# EAGLE board ASD2511 (EAGLE 6.3)
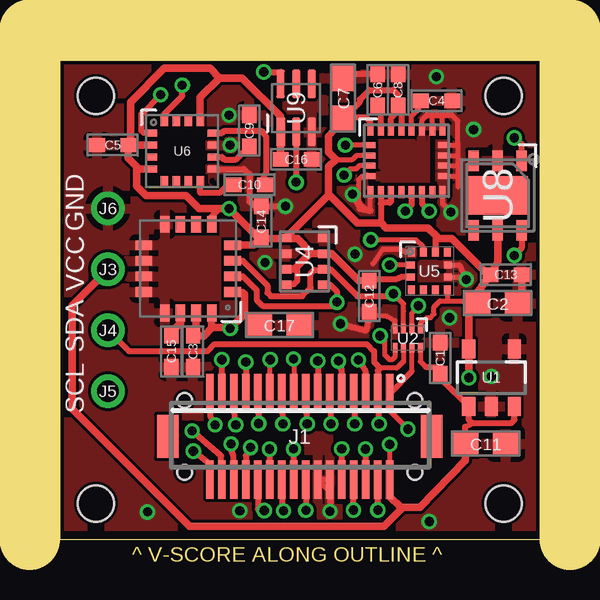
[diagram p0: board, top side]
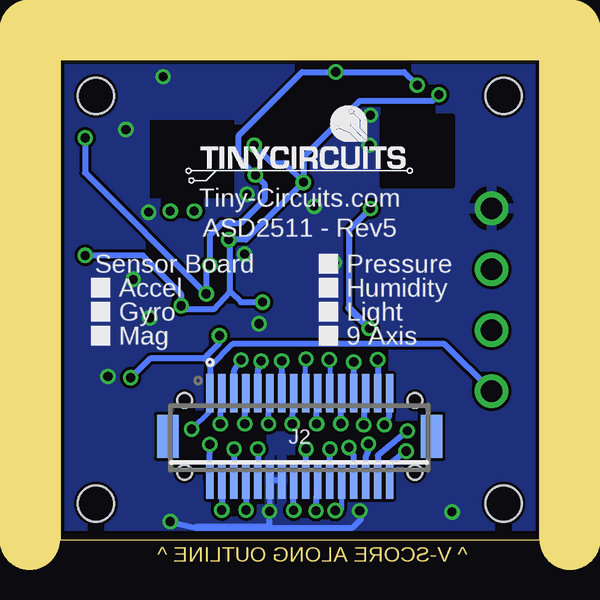
[diagram p1: board, bottom side, seen from below]

Size 20 x 20 mm. Coordinates in mm from the lower left corner, seen from the top.
Outline: 0,20 20,20 20,0 0,0 0,20
Copper layers (1*16): Top 0.035mm / dielectric 1.5mm / Bottom 0.035mm
Design rules "default *": minimum track width 5mil, minimum drill 12mil, track to track 5mil, track to pad 5mil, pad to pad 5mil, via to via 6mil, smd to smd 5mil, copper to edge 6mil, drill to drill 8mil, minimum pad ring 10mil, minimum via ring 5mil, stop-mask expansion 4mil, vias tented up to drill 25mil, thermal gap 10mil
Holes 1.5 mm at 1.5,18.5 18.5,18.5 18.5,1.5 1.5,1.5
tRestrict: 19 lines
bRestrict: area 12.8,14.2 to 16.2,17.5; 5 lines
Milling: 3 lines

## Footprints (pad centres in the part's own frame; a part is rotated, then mirrored left to right if it is on the bottom)
C0402 = smd 0.65 x 0.6: 1 -0.65,0; 2 0.65,0
C0603 = smd 1.1 x 1: 1 -0.85,0; 2 0.85,0
DF12-32-DP = smd 0.3 x 1.6: 1 -3.75,-1.8; 2 -3.75,1.8; 3 -3.25,-1.8; 4 -3.25,1.8; 5 -2.75,-1.8; 6 -2.75,1.8; 7 -2.25,-1.8; 8 -2.25,1.8; 9 -1.75,-1.8; 10 -1.75,1.8; 11 -1.25,-1.8; 12 -1.25,1.8; 13 -0.75,-1.8; 14 -0.75,1.8; 15 -0.25,-1.8; 16 -0.25,1.8; 17 0.25,-1.8; 18 0.25,1.8; 19 0.75,-1.8; 20 0.75,1.8; 21 1.25,-1.8; 22 1.25,1.8; 23 1.75,-1.8; 24 1.75,1.8; 25 2.25,-1.8; 26 2.25,1.8; 27 2.75,-1.8; 28 2.75,1.8; 29 3.25,-1.8; 30 3.25,1.8; 31 3.75,-1.8; 32 3.75,1.8 | smd 0.9 x 1.8: F1 -5.5,0; F2 5.5,0 | hole 0.6: -4.8,1.5; 4.8,1.5
DF12-32-DS = smd 0.3 x 1.6: 1 -3.75,1.8; 2 -3.75,-1.8; 3 -3.25,1.8; 4 -3.25,-1.8; 5 -2.75,1.8; 6 -2.75,-1.8; 7 -2.25,1.8; 8 -2.25,-1.8; 9 -1.75,1.8; 10 -1.75,-1.8; 11 -1.25,1.8; 12 -1.25,-1.8; 13 -0.75,1.8; 14 -0.75,-1.8; 15 -0.25,1.8; 16 -0.25,-1.8; 17 0.25,1.8; 18 0.25,-1.8; 19 0.75,1.8; 20 0.75,-1.8; 21 1.25,1.8; 22 1.25,-1.8; 23 1.75,1.8; 24 1.75,-1.8; 25 2.25,1.8; 26 2.25,-1.8; 27 2.75,1.8; 28 2.75,-1.8; 29 3.25,1.8; 30 3.25,-1.8; 31 3.75,1.8; 32 3.75,-1.8 | smd 0.9 x 1.8: F1 -5.5,0; F2 5.5,0 | hole 0.6: -4.8,1.5; 4.8,1.5
1X.1"_2 = drill 0.889 pad 1.397: 1 0,0
SOT-25 = smd 0.55 x 0.8: 1 -0.95,-1.2; 2 0,-1.2; 3 0.95,-1.2; 4 0.95,1.2; 5 -0.95,1.2
DQE(R-PX2SON-N8) = smd 0.2 x 0.4: 1 -0.525,-0.4; 2 -0.175,-0.4; 3 0.175,-0.4; 4 0.525,-0.4; 5 0.525,0.4; 6 0.175,0.4; 7 -0.175,0.4; 8 -0.525,0.4
LGA-24 = smd 0.25 x 0.5: 1 -1.505,1.3; 6 -1.505,-1.3; 7 -1.075,-1.3; 8 -0.645,-1.3; 9 -0.215,-1.3; 10 0.215,-1.3; 11 0.645,-1.3; 12 1.075,-1.3; 13 1.505,-1.3; 18 1.505,1.3; 19 1.075,1.3; 20 0.645,1.3; 21 0.215,1.3; 22 -0.215,1.3; 23 -0.645,1.3; 24 -1.075,1.3 | smd 0.5 x 0.25: 2 -1.55,0.645; 3 -1.55,0.215; 4 -1.55,-0.215; 5 -1.55,-0.645; 14 1.55,-0.645; 15 1.55,-0.215; 16 1.55,0.215; 17 1.55,0.645
BMP280 = smd 0.5 x 0.35: 1 0.8,0.975; 2 0.8,0.325; 3 0.8,-0.325; 4 0.8,-0.975; 5 -0.8,-0.975; 6 -0.8,-0.325; 7 -0.8,0.325; 8 -0.8,0.975
3-AXIS_ACCELEROMETER = smd 0.3 x 0.35: 1 -0.75,0.775; 4 -0.75,-0.775; 5 -0.25,-0.775; 6 0.25,-0.775; 7 0.75,-0.775; 10 0.75,0.775; 11 0.25,0.775; 12 -0.25,0.775 | smd 0.35 x 0.3: 2 -0.775,0.25; 3 -0.775,-0.25; 8 0.775,-0.25; 9 0.775,0.25
HMC5883L = smd 0.45 x 0.3: 1 -1.275,0.75; 2 -1.275,0.25; 3 -1.275,-0.25; 4 -1.275,-0.75; 9 1.275,-0.75; 10 1.275,-0.25; 11 1.275,0.25; 12 1.275,0.75 | smd 0.3 x 0.45: 5 -0.75,-1.275; 6 -0.25,-1.275; 7 0.25,-1.275; 8 0.75,-1.275; 13 0.75,1.275; 14 0.25,1.275; 15 -0.25,1.275; 16 -0.75,1.275
L3G4200D = smd 0.7 x 0.4: 1 -1.85,0.975; 2 -1.85,0.325; 3 -1.85,-0.325; 4 -1.85,-0.975; 9 1.85,-0.975; 10 1.85,-0.325; 11 1.85,0.325; 12 1.85,0.975 | smd 0.4 x 0.7: 5 -0.975,-1.85; 6 -0.325,-1.85; 7 0.325,-1.85; 8 0.975,-1.85; 13 0.975,1.85; 14 0.325,1.85; 15 -0.325,1.85; 16 -0.975,1.85
DFN6 = smd 0.85 x 0.45: 1 -1.45,1; 2 -1.45,0; 3 -1.45,-1; 4 1.45,-1; 5 1.45,0; 6 1.45,1 | smd 1.6 x 2.5: PAD 0,0
TSL2572 = smd 1.2 x 0.35: 1 -1,0.65; 2 -1,0; 3 -1,-0.65; 4 1,-0.65; 5 1,0; 6 1,0.65

## Placement (x,y rotation side)
C1  0.1uF  [C0402]  15.86,7.57 90 top
C2  10uF  [C0603]  18.25,9.85 0 top
C3  0.1uF  [C0402]  5.55,7.85 270 top
C4  10nF  [C0402]  15.7,18.3 0 top
C5  0.1uF  [C0402]  2.2,16.45 180 top
C6  0.1uF  [C0402]  13.25,18.75 90 top
C7  10uF  [C0603]  11.8,18.4 90 top
C8  0.1uF  [C0402]  14.1,18.75 90 top
C9  4.7uF  [C0402]  7.9,17.05 90 top
C10  .22uF  [C0402]  7.9,14.8 0 top
C11  10uF  [C0603]  17.75,4 0 top
C12  0.1uF  [C0402]  12.9,10.15 270 top
C13  0.1uF  [C0402]  18.6,11.05 0 top
C14  0.1uF  [C0402]  8.4,13.25 90 top
C15  0.1uF  [C0402]  4.65,7.85 270 top
C16  0.1uF  [C0402]  9.85,15.85 0 top
C17  10uF  [C0603]  9.15,8.95 0 top
J1  DF12-32-DP  [DF12-32-DP]  10,4.3 180 top
J2  DF12-32-DS  [DF12-32-DS]  10,4.3 0 bottom
J3  PIN_1X.1"1  [1X.1"_2]  2,11.27 0 top
J4  PIN_1X.1"1  [1X.1"_2]  2,8.73 0 top
J5  PIN_1X.1"1  [1X.1"_2]  2,6.19 0 top
J6  PIN_1X.1"1  [1X.1"_2]  2,13.81 0 top
U1  XC6217A33  [SOT-25]  17.99,6.75 0 top
U2  TX0102  [DQE(R-PX2SON-N8)]  14.5,8.4 180 top
U3  LSM9DS1  [LGA-24]  14.45,15.8 0 top
U4  BMP280  [BMP280]  10.2,11.6 0 top
U5  BMA250  [3-AXIS_ACCELEROMETER]  15.4,11.2 0 top
U6  HMC5883L  [HMC5883L]  5.1,16.2 0 top
U7  L3G4200D  [L3G4200D]  5.35,11.3 180 top
U8  SI7020-A10-GM1  [DFN6]  18.25,14.35 270 top
U9  TSL2572  [TSL2572]  9.85,18 90 top
U$1  [DOCFIELD-TINYCIRCUITS-PCB]  33.91,-10 0 top  (outside the outline)

## Library data of the parts
C1 C8 C15 C16 = tinycircuits; DATABASE: ./../../../../../Components/TinyCircuits_Part_Database.txt; PARTNO: AS-ITM-00008
C2 C7 = tinycircuits; DATABASE: ./../../../../../Components/TinyCircuits_Part_Database.txt; PARTNO: AS-ITM-00002
C3 C5 C6 C12-C14 = tinycircuits; PARTNO: AS-ITM-00008
C4 = tinycircuits; PARTNO: AS-ITM-00084
C9 = tinycircuits; PARTNO: AS-ITM-00242
C10 = tinycircuits; PARTNO: AS-ITM-00087
C11 C17 = tinycircuits; PARTNO: AS-ITM-00002
J1 = tinycircuits; PARTNO: AS-ITM-00015
J2 = tinycircuits; PARTNO: AS-ITM-00012
J3 = tinycircuits
J4-J6 = tinycircuits; DATABASE: ./../../../../../Components/TinyCircuits_Part_Database.txt
U1 = tinycircuits; PARTNO: AS-ITM-00249
U2 = tinycircuits; PARTNO: AS-ITM-00073; VALUE: TXS0102
U3 = tinycircuits; PARTNO: AS-ITM-00265
U4 = tinycircuits; PARTNO: AS-ITM-00264
U5 = tinycircuits; PARTNO: AS-ITM-00070
U6 = tinycircuits; PARTNO: AS-ITM-00086
U7 = tinycircuits; PARTNO: AS-ITM-00089
U8 = tinycircuits; PARTNO: AS-ITM-00218
U9 = tinycircuits; PARTNO: AS-ITM-00116
U$1 = tinycircuits; NO_BOM: TRUE

## Nets
+3V3: J1.6 J2.6
+5V: J1.8 J2.8
AD0: J1.11 J2.11
AD1: J1.9 J2.9
AD2: J1.7 J2.7
AD3: J1.5 J2.5
AD4/SDA: J1.3 J2.3 J4.1 U2.6
AD5/SCL: J1.1 J2.1 J5.1 U2.7
AREF: J1.13 J2.13
GND: C1.2 C2.2 C3.2 C4.2 C5.2 C6.2 C7.2 C8.2 C9.2 C11.2 C12.2 C13.2 C14.2 C15.2 C16.2 C17.2 J1.12 J1.14 J2.12 J2.14 J6.1 U1.2 U1.4 U2.4 U3.5 U3.6 U3.13 U3.14 U3.15 U3.16 U3.17 U3.18 U3.19 U3.20 U4.1 U4.7 U5.1 U5.8 U5.9 U6.9 U6.11 U7.8 U7.9 U7.10 U7.11 U7.12 U7.13 U8.2 U9.3
IO0: J1.24 J2.24
IO1: J1.26 J2.26
IO2: J1.28 J2.28
IO3: J1.30 J2.30
IO4: J1.32 J2.32
IO5: J1.31 J2.31
IO6: J1.29 J2.29
IO7: J1.27 J2.27
IO8: J1.25 J2.25
IO9: J1.23 J2.23
MISO: J1.17 J2.17
MOSI: J1.19 J2.19
N$2: C4.1 U3.21
N$3: C15.1 U7.14
N$4: C9.1 U6.10
N$6: C6.1 U3.24
N$7: C10.2 U6.12
N$9: C10.1 U6.8
N$10: U9.5
N$11: U3.9
N$12: U7.6
N$14: U5.5
N$15: U5.6
N$16: U7.7
N$17: U3.10
N$18: U3.11
N$19: U3.12
RESET: J1.22 J2.22
RSV0: J1.20 J2.20
RSV1: J1.18 J2.18
RSV2: J1.16 J2.16
SCK: J1.15 J2.15
SCL_3V3: U2.2 U3.2 U4.4 U5.12 U6.1 U7.2 U8.6 U9.2
SDA_3V3: U2.3 U3.4 U4.3 U5.2 U6.16 U7.3 U8.1 U9.6
SS: J1.21 J2.21
VBATT: J1.4 J2.4
VCC: C1.1 C11.1 J1.2 J2.2 J3.1 U1.1 U1.3 U2.8
VCC_3V3: C2.1 C3.1 C5.1 C7.1 C8.1 C12.1 C13.1 C14.1 C16.1 C17.1 U1.5 U2.1 U2.5 U3.1 U3.3 U3.7 U3.8 U3.22 U3.23 U4.2 U4.5 U4.6 U4.8 U5.3 U5.7 U5.11 U6.2 U6.4 U6.13 U7.1 U7.4 U7.5 U7.15 U7.16 U8.5 U9.1
VIN: J1.10 J2.10

## Tracks (layer width: path | path; a pad name or v marks a point on that pad's centre or on a via)
+3V3  (via drill 0.38)
  Top 0.254: J2.6 v12.75,3.77 v12.74,3.77
  Bottom 0.254: v12.74,3.77 12.74,2.51 J2.6
+5V  (via drill 0.38)
  Top 0.254: v12.24,1.23 J2.8
  Bottom 0.254: J2.8 12.25,1.21 v12.24,1.23
AD0  (via drill 0.38)
  Top 0.254: v11.3,4.83 11.31,5.05 J2.11
  Bottom 0.254: J2.11 11.28,5.79 v11.3,4.83
AD1  (via drill 0.38)
  Top 0.254: J2.9 11.74,7.07 v11.61,7.44
  Bottom 0.254: v11.61,7.44 11.73,7.07 J2.9
AD2  (via drill 0.38)
  Top 0.254: v12.29,4.83 12.31,5.05 J2.7
  Bottom 0.254: J2.7 12.27,5.86 v12.29,4.83
AD3  (via drill 0.38)
  Top 0.254: J2.5 12.73,7.04 v12.45,7.49
  Bottom 0.254: v12.45,7.49 12.73,7.05 J2.5
AD4/SDA  (via drill 0.38)
  Top 0.2: U2.6 14.32,7.43 14.05,7.15
  Top 0.203: 14.05,7.15 13.35,7.15
  Top 0.254: v13.31,4.83 13.31,5 J2.3 13.25,7.05 13.35,7.15 13.1,7.4 13.1,7.85 12.8,8.15 6.45,8.15 6.15,7.85 2.88,7.85 J4.1
  Bottom 0.254: J2.3 13.28,5.86 v13.31,4.83
AD5/SCL  (via drill 0.38)
  Top 0.2: 14.68,7.02 U2.7
  Top 0.203: J2.1 13.75,5.37 v14.51,4.61
  Top 0.254: J2.1 14.68,7.02
  Bottom 0.203: v14.51,4.61 13.75,5.37 J2.1
  Bottom 0.254: J2.1 13.75,7.2 12.8,8.15 3.96,8.15 J5.1
AREF  (via drill 0.38)
  Top 0.254: v10.75,7.45 J2.13
  Bottom 0.254: J2.13 v10.75,7.45
GND  (via drill 0.38)
  Top 0.2: U2.4 13.98,9.12 13.65,9.3 12.9,9.35
  Top 0.203: J2.12 v11.26,1.17 | 11.3,1.95 11.3,1.14 | 11.3,1.14 11.29,1.13 11.29,1.09 | J2.14 11.27,1.97 11.27,1.93 11.22,1.87 11.27,1.16 11.28,1.07 11.28,1.03 11.3,1.01 11.37,1.01 | 11.3,1.14 11.3,1.01 | U5.8 16.6,10.95 v16.95,10.85 16.65,11.45 U5.9 | U5.1 14.43,11.98 14.15,12.1 13.45,12.1 13.05,11.5 | 12.15,19.4 C7.2 | U3.5 12.61,15.16 12.45,15 12.45,14.15 12.55,13.95 12.95,13.7 12.95,14.14 U3.6 | U3.20 15.1,17.5 15.3,17.7 15.55,17.7 | 15.55,17.7 16,17.7 | 16,17.7 16.35,17.7 16.6,17.45 16.6,16.5 16.55,16.45 U3.17 16.59,16.45 16.6,16.45 16.6,16 | U3.19 15.52,17.68 15.55,17.7 | U3.18 15.95,17.66 16,17.7 | 16.6,16 16.6,15.55 | 16.6,15.55 16.6,15.1 | 16.6,15.1 16.6,14.7 | U3.16 16.59,16.02 16.6,16 | U3.15 16.57,15.59 16.6,15.55 | U3.14 16.55,15.16 16.6,15.1 | U3.13 15.95,14 v16.3,13.65
  Top 0.254: J2.12 J2.14 | C12.2 12.9,9.35 12.75,8.7 v11.7,9 12.2,8.85 | U6.9 7.65,15.45 7.9,15.25 7.9,14.1 8.15,13.9 v9.4,13.9 | v12.2,14.4 12.5,13.8 12.95,13.7 | C6.2 12.23,19.4 arc45 12.01,19.31 C7.2
  Top 0.305: C2.2 19.25,10.2 C13.2
  Bottom 0.203: v11.26,1.17 11.25,1.21 J2.12
  Bottom 0.254: J2.12 J2.14 | v15.4,0.75 14.35,0.5 | 14.35,0.5 7.8,0.5 7.45,0.85 v7.5,1.2 | 14.35,0.5 14.3,0.55 11.25,0.55 11.26,0.56 v11.26,1.17
  other vias: 15.7,19.3 7.05,17.7 17.25,17.1 3.65,1.15 7.1,16.45 8.55,11.55 12.3,11.9 18,6.8 16.25,9.25
  pour Top: 0,0 20,0 20,20 0,20
  pour Bottom: 0,20 20,20 20,0 0,0
IO0  (via drill 0.38)
  Top 0.254: J2.24 8.25,1.26 v8.52,1.21
  Bottom 0.203: v8.52,1.21 8.48,1.27 8.25,1.27 J2.24
  Bottom 0.254: J2.24
IO1  (via drill 0.38)
  Top 0.254: v7.95,3.84 7.95,3.7 7.75,3.5 J2.26
  Bottom 0.254: J2.26 7.75,3.5 7.95,3.7 v7.95,3.84
IO2  (via drill 0.38)
  Top 0.254: v7.13,3.99 7.07,3.89 7.22,3.49 7.29,2.61 7.26,2.51 J2.28
  Bottom 0.254: J2.28 7.24,3.43 7.07,3.88 v7.13,3.99
IO3  (via drill 0.38)
  Top 0.254: J2.30 6.73,3.49 v5.51,4.53
  Bottom 0.254: v5.51,4.53 6.75,3.51 6.77,2.53 J2.30
IO4  (via drill 0.38)
  Top 0.254: J2.32 6.25,3.14 v5.56,3.69
  Bottom 0.254: v5.56,3.69 5.61,3.65 6.21,3.18 6.21,3.14 6.26,3.1 J2.32
IO5  (via drill 0.38)
  Top 0.254: v6.47,4.79 6.28,5.13 J2.31
  Bottom 0.254: J2.31 6.26,5.14 v6.47,4.79
IO6  (via drill 0.38)
  Top 0.254: J2.29 v6.75,7.5
  Bottom 0.203: 6.74,6.11 J2.29
  Bottom 0.254: v6.75,7.5 J2.29
IO7  (via drill 0.38)
  Top 0.254: v7.33,4.78 7.31,4.9 J2.27
  Bottom 0.254: J2.27 7.29,5.76 v7.33,4.78
IO8  (via drill 0.38)
  Top 0.203: 7.76,6.11 J2.25
  Top 0.254: v7.75,7.4 J2.25
  Bottom 0.254: J2.25 v7.75,7.4
IO9  (via drill 0.38)
  Top 0.254: v8.29,4.83 8.31,4.98 J2.23
  Bottom 0.254: J2.23 8.28,5.59 v8.29,4.83
MISO  (via drill 0.38)
  Top 0.203: v9.73,7.53 9.75,7.46 J2.17
  Bottom 0.203: J2.17 9.76,6.11 9.76,7.17 9.73,7.3 v9.73,7.53
MOSI  (via drill 0.38)
  Top 0.254: v9.3,4.83 9.31,4.95 J2.19
  Bottom 0.254: J2.19 9.27,5.76 v9.3,4.83
N$2
  Top 0.203: U3.21 14.66,17.66 14.95,17.95 C4.1
N$3
  Top 0.305: U7.14 5.03,9.02 4.65,8.65 C15.1
N$4
  Top 0.254: U6.10 6.75,15.95 6.85,15.85 7.35,15.85 C9.1
N$6
  Top 0.203: 13.38,17.93 C6.1
  Top 0.254: U3.24 13.38,17.93
N$7
  Top 0.254: U6.12 6.75,16.95 6.85,17.05 8.4,17.05 8.6,16.8 8.6,15.3 8.3,14.8 C10.2
N$9
  Top 0.254: C10.1 7,14.8 6.65,14.45 5.85,14.45 U6.8
N$17  (via drill 0.38)
  Top 0.254: U3.10 14.66,13.96 v14.4,13.7
N$18  (via drill 0.38)
  Top 0.254: U3.11 15.09,14 v15.4,13.7
RESET  (via drill 0.38)
  Top 0.254: v8.74,3.77 J2.22
  Bottom 0.254: J2.22 8.75,3.69 v8.74,3.77
RSV0  (via drill 0.38)
  Top 0.254: J2.20 9.25,1.2 v9.32,1.2
  Bottom 0.254: v9.32,1.2 J2.20
RSV1  (via drill 0.38)
  Top 0.254: v9.74,3.77 9.74,2.51 J2.18
  Bottom 0.254: J2.18 9.75,3.72 v9.74,3.77
RSV2  (via drill 0.38)
  Top 0.254: J2.16 10.25,1.16 v10.25,1.22
  Bottom 0.254: v10.25,1.22 J2.16
SCK  (via drill 0.38)
  Top 0.254: v10.31,4.83 10.31,4.98 J2.15
  Bottom 0.254: J2.15 10.29,5.66 v10.31,4.83
SCL_3V3  (via drill 0.38)
  Top 0.2: U2.2 14.68,9.43 14.9,9.7
  Top 0.203: U5.12 15.15,12.2 14.85,12.5 13.06,12.5 v12.96,12.5 | U3.2 11.95,16.45 v11.9,16.45
  Top 0.254: 14.9,9.7 v14.95,9.75 | U6.1 3.5,16.95 3.4,17.05 3.4,17.75 v4.2,18.55 | U9.2 v9.85,14.9 | U7.2 7.62,10.98 8.2,10.4 8.2,10 8.45,9.75 11.4,9.75 v11.55,9.9 11.55,10.35 11.27,10.62 U4.4 | U8.6 19.25,12.15 v18.95,11.85
  Bottom 0.203: 12.9,12.44 v12.96,12.5
  Bottom 0.254: v11.9,16.45 11.15,15.7 10.65,15.7 v9.85,14.9 | 12.9,10.35 13.6,9.6 14.8,9.6 v14.95,9.75 14.95,10.25 16.55,11.85 v18.95,11.85 | 12.9,10.35 12.9,12.44 | v9.85,14.9 12.25,12.5 v12.96,12.5 | 12.9,10.35 12.45,9.9 v11.55,9.9 | v4.2,18.55 4.45,18.3 7.5,18.3 9.85,15.95 v9.85,14.9
SDA_3V3  (via drill 0.38)
  Top 0.2: U2.3 14.32,9.52
  Top 0.203: U5.2 v13.75,11.45 | U3.4 12.48,15.59 12.35,15.45 12.1,15.45 v11.85,15.2 | 14.32,9.52 14.32,9.82 v13.9,10.25
  Top 0.254: U8.1 19.25,16.5 v18.95,16.75 | v8.5,19.5 9.2,19.5 U9.6 | U7.3 7.62,11.62 8.65,10.6 8.65,10.3 8.8,10.15 10.1,10.15 10.45,10.5 10.45,11.1 10.6,11.25 10.98,11.25 U4.3 11.27,11.27 12.4,10.15 13.8,10.15 v13.9,10.25 | U6.16 4.35,17.75 5.1,18.5 v5.1,18.95
  Bottom 0.254: v5.1,18.95 5.65,19.5 v8.5,19.5 9.9,19.5 12.55,16.85 12.55,15.9 v11.85,15.2 11.45,14.8 11.45,14.2 12.45,13.2 13.25,13.2 13.75,12.7 v13.75,11.45 13.9,11.3 v13.9,10.25 18.95,15.3 v18.95,16.75
SS  (via drill 0.38)
  Top 0.203: J2.21 8.77,6.12 v8.77,7.5
  Bottom 0.203: v8.77,7.5 8.75,7.53 J2.21
VBATT  (via drill 0.38)
  Top 0.254: v13.25,1.23 J2.4
  Bottom 0.254: J2.4 13.25,1.24 v13.25,1.23
VCC  (via drill 0.38)
  Top 0.2: U2.8 15.02,7.43 15.25,7.2
  Top 0.203: J2.2 13.73,2.67 v13.75,3.97 13.75,1.81
  Top 0.254: 14.21,1.26 14.21,1.35 | U1.3 18.95,5.54 18.95,5 18.8,4.85 17.2,4.85 | 17.2,4.85 17.05,5 17.05,5.54 U1.1 15.91,6.68 C1.1 15.89,7.2 15.25,7.2 | C11.1 16.9,4.7 17.2,4.85
  Top 0.305: C11.1 16.9,3.3 15,1.35 14.21,1.35 13.75,1.81 | J3.1 0.5,9.77 0.5,5.45 5.4,0.55 13.5,0.55 14.21,1.26
  Bottom 0.203: J2.2 13.77,2.45
  Bottom 0.254: 13.77,2.45 v13.75,3.97
VCC_3V3  (via drill 0.38)
  Top 0.2: 15.3,9.25 15.04,9.04 U2.1 | U2.5 13.98,7.62 13.85,7.5 13.75,7.5 13.55,7.7 13.55,8.3 v13.35,8.5
  Top 0.203: U5.7 16.15,9.95 | 16.15,9.95 16.9,9.95 C2.1 | 13.1,10.6 C12.1 13.05,10.85 | 14.1,17.95 C8.1 14.29,17.91 14.23,17.77 | U3.1 12.95,17.16 12.95,17.45 | 12.05,17.6 C7.1 | U3.3 12.36,16.02 12.2,15.85 11.5,15.85 | 9.43,12.55 U4.8 9.4,12.55 | 10.48,11.98 10.52,11.93 | 7.7,9.4 8.15,8.95 C17.1 | 15.3,9.25 15.45,9.25 15.6,9.4 15.6,9.7 15.85,9.95 16.15,9.95
  Top 0.254: C2.1 16.9,10 | 15.65,12.7 U5.11 | U5.3 14.25,10.95 14,10.85 13.05,10.85 | 5.68,8.62 C3.1 | U7.1 7.62,10.32 7.7,10.25 | 6.35,8.85 6.32,8.82 | 6.65,13.8 6.32,13.48 U7.5 | U6.4 3.2,15.45 | U3.23 13.8,17.55 14.1,17.95 | C8.1 14.1,18.55 13.9,18.75 12.9,18.75 12.5,18.35 12.5,18.25 C7.1 | 14.23,17.77 U3.22 | U3.1 12.95,17.45 12.75,17.6 12.05,17.6 | U4.5 9.43,10.65 9.75,10.65 9.9,10.8 9.9,11.4 | U3.7 13.38,14 | 13.38,14 13.38,13.23 13.4,13.2 | U3.8 13.8,14.11 13.75,14.05 13.43,14.05 13.38,14
  Top 0.305: C12.1 12.45,10.8 11.32,11.93 U4.2 10.52,11.93 | U7.15 5.68,8.62 | U7.16 6.32,8.82 6,8.5 C3.1 | U7.4 8.07,12.27 C14.1 | 7.7,10.25 7.7,9.4 v7.1,8.8 7,8.85 6.35,8.85 | U4.6 9.77,11.27 9.9,11.4 10.48,11.98 9.9,12.55 9.4,12.55 8.45,12.55 C14.1 | C13.1 18.25,11.6 U8.5 | C13.1 17.9,11 16.35,12.55 15.8,12.55 15.65,12.7 15.35,13 13.6,13 13.4,13.2 12.4,13.2 11.2,14.4 | U4.8 11.2,14.38 11.2,14.4 | C14.1 8.25,12.6 v7.05,13.8 6.65,13.8 5.8,13.8 5.25,14.35 3.6,14.35 3.2,14.75 3.2,15.45 | U6.4 3.3,15.45 2.85,15.9 C5.1 | C5.1 2.95,16.55 2.95,18.25 4.35,19.65 6.25,19.65 6.65,19.25 | C16.1 U9.1 9.2,17.65 7.6,19.25 6.65,19.25 | U6.13 5.85,18.45 6.65,19.25 | U6.2 C5.1 | 11.2,14.4 11.2,15.55 11.5,15.85 11.2,16.15 11.2,16.8 C7.1 | v17.05,6.75 U1.5 17.04,9.69 C2.1 17.4,10.3 C13.1
  Bottom 0.254: v13.35,8.5 13.35,8.2 14,7.55 16.25,7.55 v17.05,6.75 | 7.95,9.65 7.95,12.9 v7.05,13.8
  Bottom 0.305: 7.95,9.65 v7.1,8.8
VIN  (via drill 0.38)
  Top 0.254: J2.10 v11.76,3.78 v11.75,3.78
  Bottom 0.254: v11.75,3.78 J2.10

## Text on the board
Dimension: ^ V-SCORE ALONG OUTLINE ^
tPlace: GND | VCC | SDA | SCL
bPlace: Tiny-Circuits.com | ASD2511 - Rev5 | Pressure | Sensor Board | Humidity | Light | Accel | Gyro | 9 Axis | Mag
Document: FABRICATION DRAWING | NOTES: | 1. PRINTED CIRCUIT BOARD MADE FROM NEMA GRADE FR-4 EPOXY LAMINATE | WITH 1 OUNCE COPPER PLATING AND .024 THICKNESS. | 2. ALL DIMENSIONS ARE GIVEN IN INCHES. | 3. CIRCUIT PATHS ARE FOR REFERENCE ONLY. | 4. HOLE SIZES SHOWN ARE FINISHED DIAMETERS AFTER PLATING. | 5. BOARD PLATED USING REFLOW OR SIMILAR METHOD. | 6. BOARD TO HAVE BLUE SOLDER MASK ON PLATED SURFACES USING WET FILM | 7. SILKSCREEN BOARD USING WHITE INK. | SR100 OR SR1010 EPOXY. EQUIVALENT WET OR DRY FILM MAY BE USED. | 8. THE FOLLOWING INFORMATION APPLIES TO THIS BOARD: | * 2 COPPER LAYERS | * .024 BOARD THICKNESS | * REQUIRES TOP SIDE SILKSCREEN | Released under the Creative Commons Attribution Share-Alike 3.0 License | http://creativecommons.org/licenses/by-sa/3.0 | Original Arduino Uno Design by Team Arduino | LilyPad Arduino Design by Leah Buechley and Sparkfun Electronics | TinyDuino, TinyLily and TinyShield Designs by TinyCircuits | TinyShield - Sensor Board | AS-PCB-ASD2511 | 5